# Altium PCB DBG-020.PcbDoc
Units mil, origin at the board's own origin, x right, y up, seen from the top; angles counter-clockwise.
Board outline 1750 x 2275 mil, 2 copper layers (Top Layer, Bottom Layer), stack 62.8 mil thick; 12 components, 55 nets, 445 pads, 120 vias.
Unrouted connection lines stored in the file: 1.
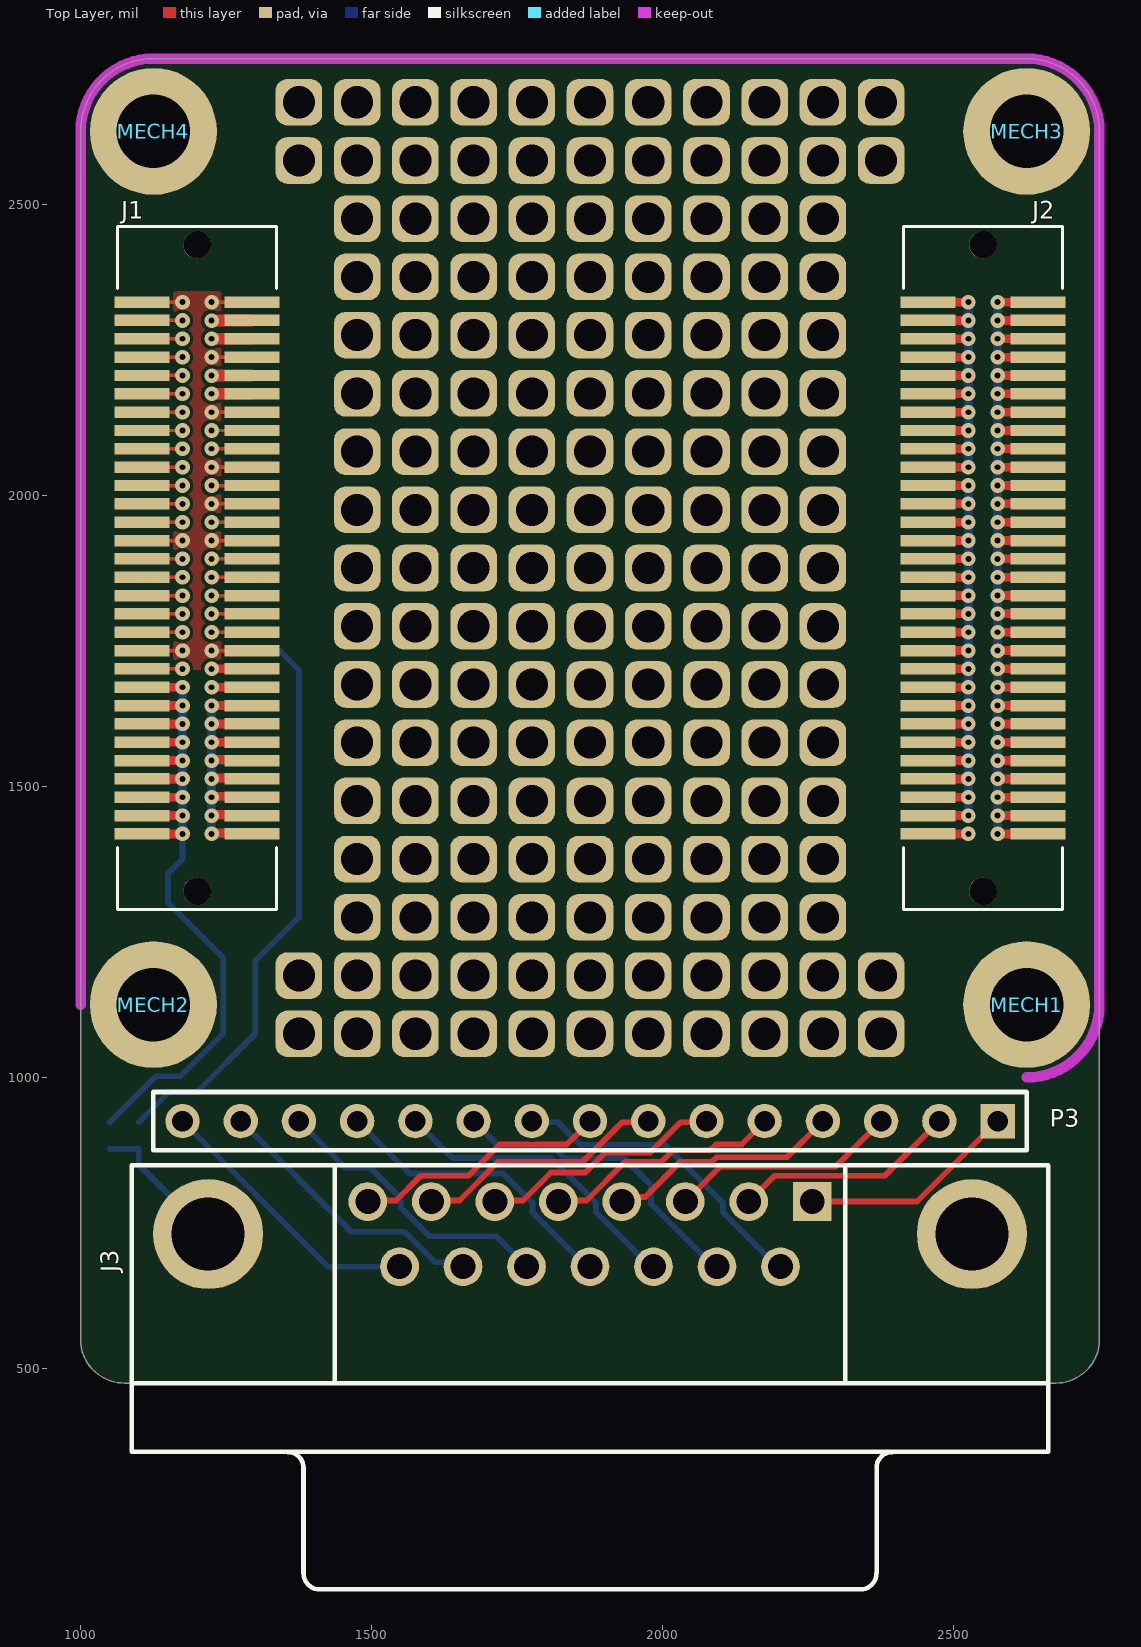
[diagram p0: Top Layer view]
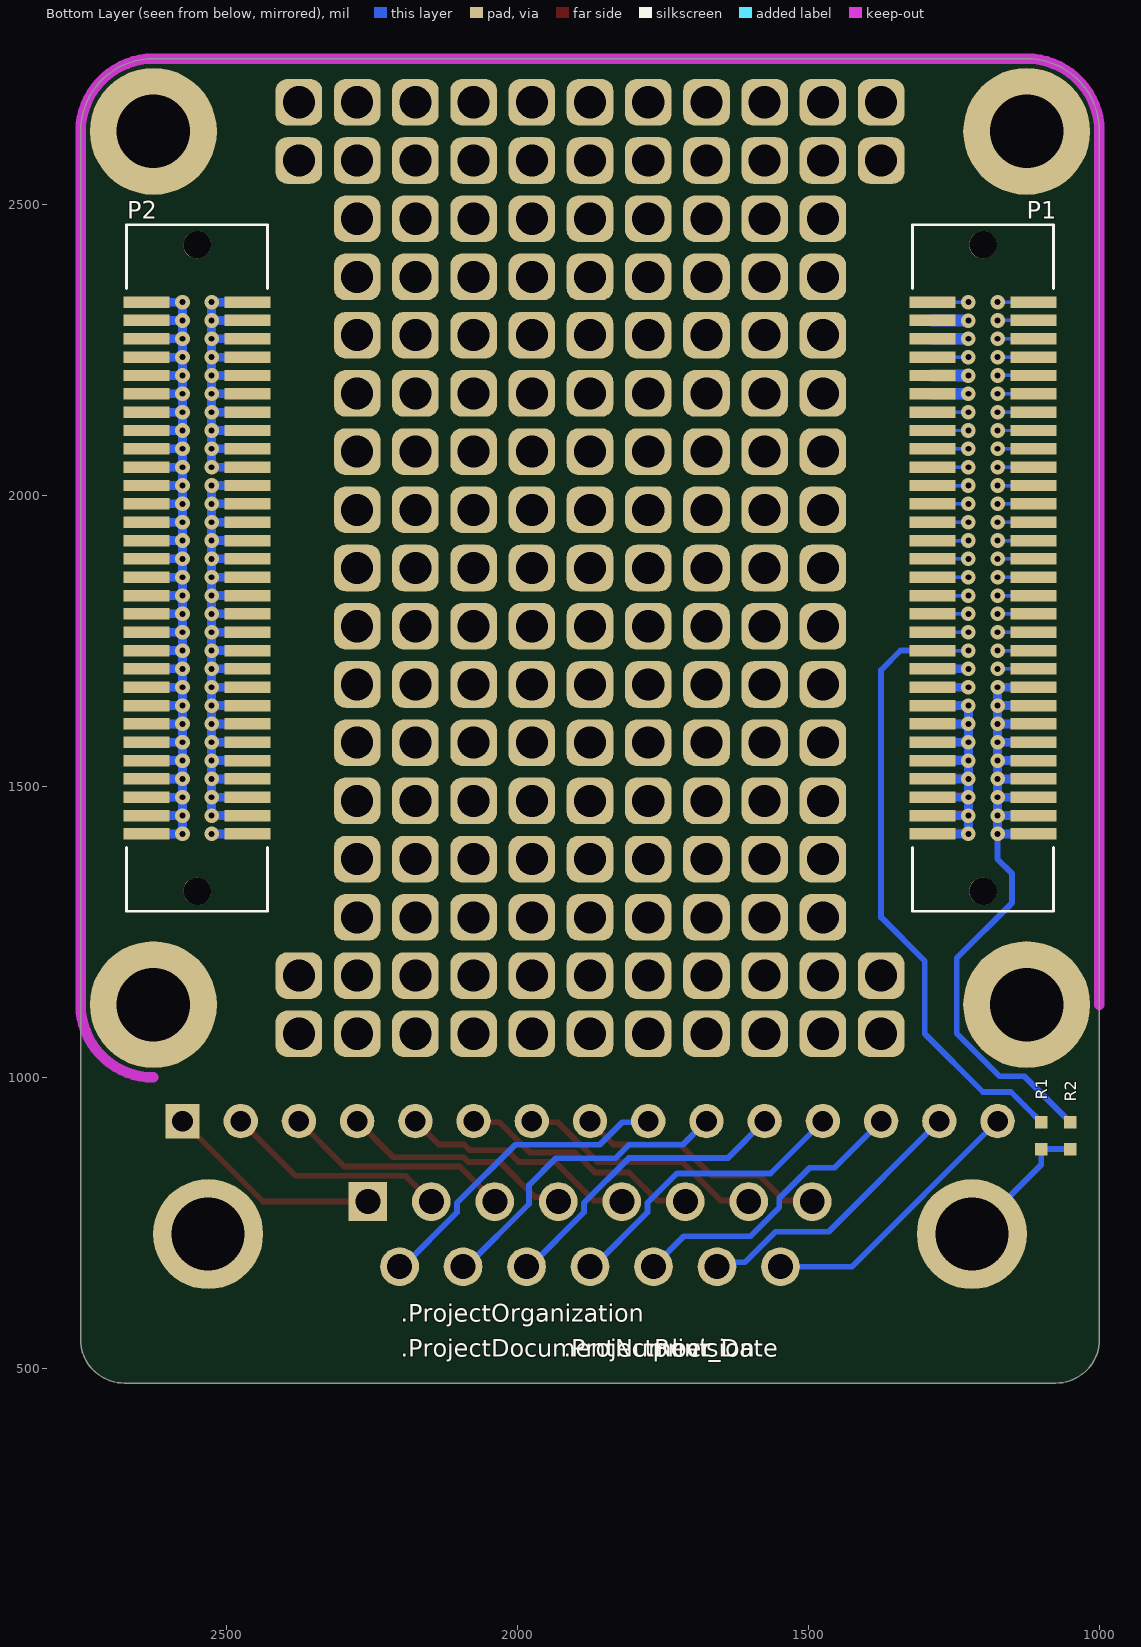
[diagram p1: Bottom Layer view, seen from below]
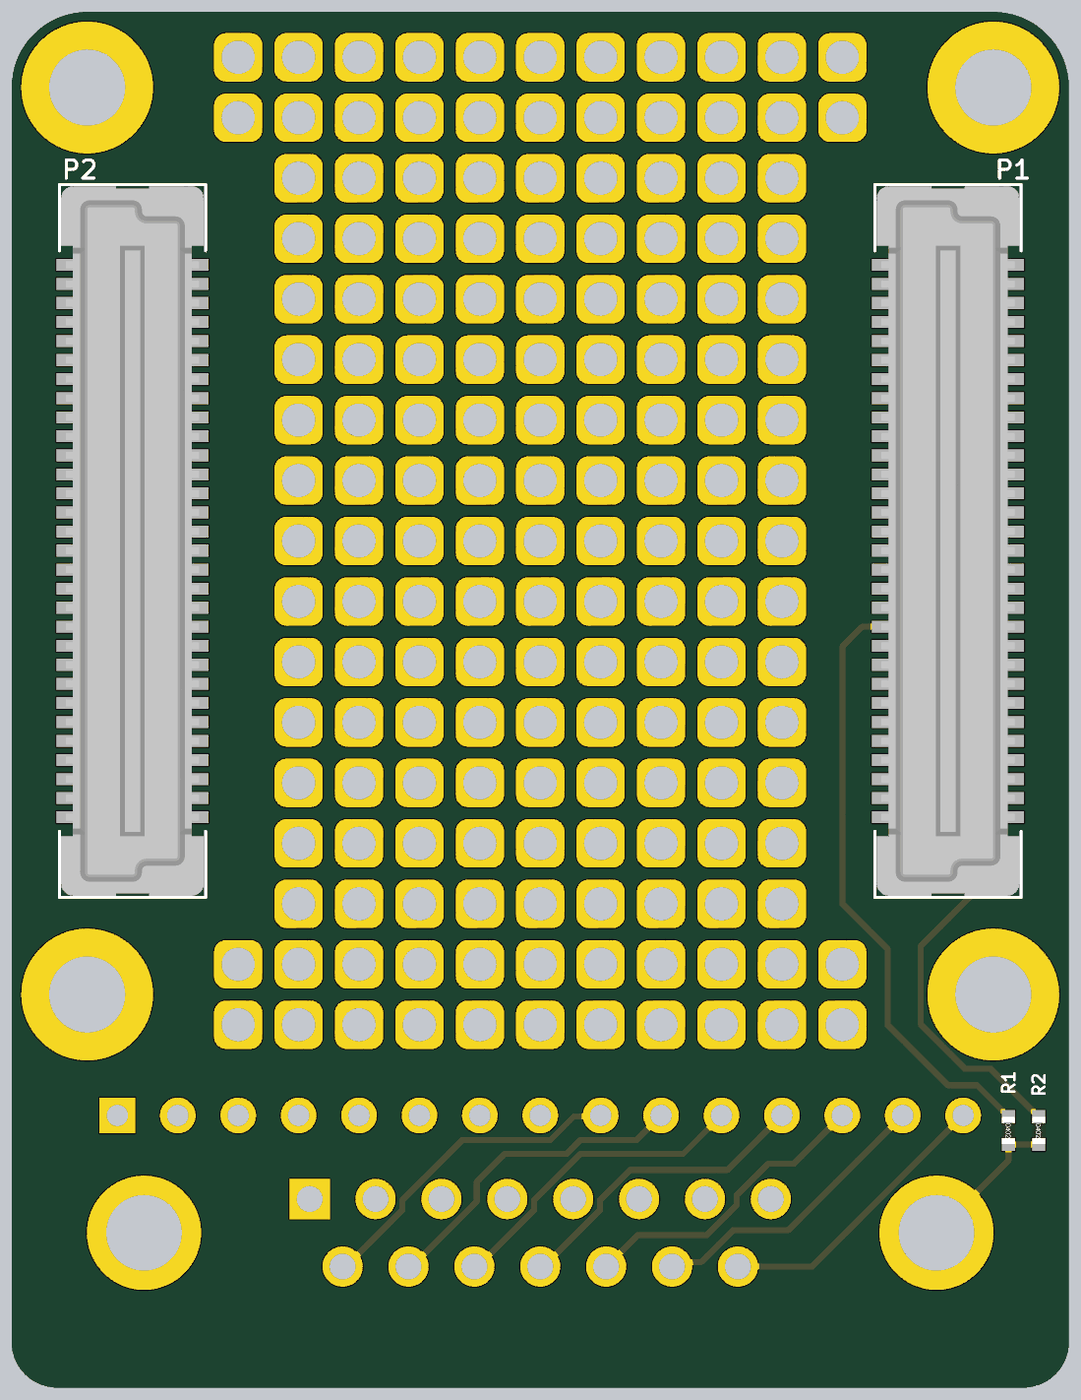
[diagram p2: 3D render of the assembled board from below, using the file's embedded part models]

## Layer stack, top to bottom
Top Solder: solder mask 1, Solder Resist, Dk 3.5
Top Layer: signal copper 1.4
Dielectric 1: core 60, FR-4, Dk 4.6
Bottom Layer: signal copper 1.4
Bottom Solder: solder mask 1, Solder Resist, Dk 3.5

## Board outline
1000,550 ccw(c1075,550) 1075,475 2675,475 ccw(c2675,550) 2750,550 2750,2625 ccw(c2625,2625) 2625,2750 1125,2750 ccw(c1125,2625) 1000,2625

## Design rules (kind name [scope] priority, off if disabled: settings)
AssemblyTestPointUsage AssemblyTestPointUsage_1 [All] p2:
AssemblyTestpoint AssemblyTestpoint_1 [All] p2: testpointundercomponent=TRUE minsize=40 maxsize=100 preferedsize=60 minholesize=0 maxholesize=40 preferedholesize=32 testpointgrid=1 usegrid=TRUE gridtolerance=0.01 allowsidetop=TRUE allowsidebottom=TRUE
BoardOutlineClearance [All] p1: gap=10 ignorepadtopadclearanceinfootprint=FALSE except(0: Arc-SplitContinuation Track-SplitContinuation SMDPad-SplitContinuation THPad-SplitContinuation Via-SplitContinuation Fill-SplitContinuation Poly-SplitContinuation Region-SplitContinuation Text-SplitContinuation)
Clearance [All] p1: gap=6 ignorepadtopadclearanceinfootprint=FALSE except(0: Arc-Hole Track-Hole SMDPad-Hole THPad-Hole Via-Hole Fill-Hole Poly-Hole Region-Hole Text-Hole)
ComponentClearance ComponentClearance_Top [OnTop vs OnTop] p1: gap=10 collisioncheckmode=3 verticalgap=100000 showdistances=FALSE
ComponentClearance ComponentClearance_Bottom [OnBottom vs OnBottom] p2: gap=10 collisioncheckmode=3 verticalgap=100000 showdistances=FALSE
DiffPairsRouting [All] p1: maxlimit=6 minlimit=6 mostfreqgap=6 toplayer_minwidth=20 toplayer_maxwidth=20 toplayer_prefwidth=20 bottomlayer_minwidth=20 bottomlayer_maxwidth=20 bottomlayer_prefwidth=20 maxuncoupledlength=500
FabricationTestPointUsage FabricationTestPointUsage_1 [All] p2: valid=0 allowmultiple=FALSE
FabricationTestpoint FabricationTestpoint_1 [All] p2: side=3 testpointundercomponent=TRUE minsize=40 maxsize=100 preferedsize=60 minholesize=0 maxholesize=40 preferedholesize=32 testpointgrid=1 allowsidetop=TRUE allowsidebottom=TRUE usegrid=TRUE gridtolerance=0.01
Height Height_Bottom [TouchesRoom('BoardHeight_Bottom') and OnBottom and not ((Name='J1') or (Name='J2') or (Name='P1') or (Name='P2') )] p1: minheight=0 maxheight=152 prefheight=0
Height Height_Top [TouchesRoom('BoardHeight_Top') and OnTop and not ((Name='J1') or (Name='J2') or (Name='P1') or (Name='P2') or (Name='MECH1') or (Name='MECH2') or (Name='MECH3') or (Name='MECH4') )] p2: minheight=0 maxheight=310 prefheight=0
HoleSize [All] p1: absolutevalues=TRUE maxlimit=130 minlimit=10 maxpercent=80.000 minpercent=20.000
MinimumSolderMaskSliver [All] p1: minsoldermaskwidth=3
PolygonConnect [All] p1: thpad.connectstyle=Relief thpad.reliefconductorwidth=6 thpad.reliefentries=4 thpad.polygonreliefangle="90 Angle" thpad.airgapwidth=6 smdpad.connectstyle=Relief smdpad.reliefconductorwidth=6 smdpad.reliefentries=4 smdpad.polygonreliefangle="90 Angle" smdpad.airgapwidth=6 via.connectstyle=Direct via.reliefconductorwidth=10 via.reliefentries=4 via.polygonreliefangle="90 Angle" via.airgapwidth=10
RoomDefinition BoardHeight_Bottom [False] p1: confinementstyle=ConfineIn formatcopy=TRUE lockcomponents=FALSE outline 1000,2750 2750,2750 2750,1000 1000,1000
RoomDefinition BoardHeight_Top [False] p2: confinementstyle=ConfineIn formatcopy=TRUE lockcomponents=FALSE outline 2750,2750 1000,2750 1000,1000 2750,1000
RoutingVias [All] p1: holewidth=10 width=25 viastyle="Through Hole" minholewidth=10 minwidth=25 maxholewidth=28 maxwidth=50
SilkToBoardRegionClearance SilkToBoardRegionClearance_1 [All] p2:
SilkToSilkClearance [All] p1: silktosilkclearance=2
SilkToSolderMaskClearance [IsPad] p1: minsilkscreentomaskgap=4 clearancetoexposedcopper=TRUE
SolderMaskExpansion [All] p1: expansion=2 istentingtop=FALSE
UnRoutedNet [All] p1: checkbadconnections=TRUE
Width Width_1 [All] p1: maxlimit=100 minlimit=6 preferedwidth=10
22 further rules are at their usual default settings.

## Classes and differential pairs
component class Sheet1: J1 J2 P1 P2
differential pair CAN1: +CAN1_P -CAN1_N
differential pair CAN0: +CAN0_P -CAN0_N

## Components (designator, comment, footprint, x,y, rotation, side; value= is the part's Value field where it differs from the comment)
J1 "10144517-064802LF" 10144517-064802LF 1200,1875 r90 top locked
J2 "10144517-064802LF" 10144517-064802LF 2550,1875 r90 top locked
J3 "D Connector 15" DSUB1.385-2H15 1875,356.89 r180 top locked
MECH1 "M2115-3005-SS" M2115-3005-SS 2625,1125 r0 top locked
MECH2 "M2115-3005-SS" M2115-3005-SS 1125,1125 r0 top locked
MECH3 "M2115-3005-SS" M2115-3005-SS 2625,2625 r0 top locked
MECH4 "M2115-3005-SS" M2115-3005-SS 1125,2625 r0 top locked
P1 "10144518-064802LF" 10144518-064802LF 1200,1875 r270 bottom locked
P2 "10144518-064802LF" 10144518-064802LF 2550,1875 r270 bottom locked
P3 "Header 15" HDR1X15 2575,925 r180 top locked
R1 "0.0" SMD-0402-RES 1100,900 r0 bottom locked
R2 "0.0" SMD-0402-RES 1050,900 r0 bottom locked

## Footprints (in the part's own frame and the unit in brackets; to place one, negate y for a bottom-side part, rotate by r counter-clockwise, add the part's x,y. Pads: shape width x height; smd on the part's side, far side on the other; paste and mask are expansions set on the pad)
10144517-064802LF [mm]
  rect 0.5x2.4 smd: 1(11.6,2.4) 2(11.6,-2.4) 3(10.8,2.4) 4(10.8,-2.4) 5(10,2.4) 6(10,-2.4) 7(9.2,2.4) 8(9.2,-2.4) 9(8.4,2.4) 10(8.4,-2.4) 11(7.6,2.4) 12(7.6,-2.4) 13(6.8,2.4) 14(6.8,-2.4) 15(6,2.4) 16(6,-2.4) 17(5.2,2.4) 18(5.2,-2.4) 19(4.4,2.4) 20(4.4,-2.4) 21(3.6,2.4) 22(3.6,-2.4) 23(2.8,2.4) 24(2.8,-2.4) 25(2,2.4) 26(2,-2.4) 27(1.2,2.4) 28(1.2,-2.4) 29(0.4,2.4) 30(0.4,-2.4) 31(-0.4,2.4) 32(-0.4,-2.4) 33(-1.2,2.4) 34(-1.2,-2.4) 35(-2,2.4) 36(-2,-2.4) 37(-2.8,2.4) 38(-2.8,-2.4) 39(-3.6,2.4) 40(-3.6,-2.4) 41(-4.4,2.4) 42(-4.4,-2.4) 43(-5.2,2.4) 44(-5.2,-2.4) 45(-6,2.4) 46(-6,-2.4) 47(-6.8,2.4) 48(-6.8,-2.4) 49(-7.6,2.4) 50(-7.6,-2.4) 51(-8.4,2.4) 52(-8.4,-2.4) 53(-9.2,2.4) 54(-9.2,-2.4) 55(-10,2.4) 56(-10,-2.4) 57(-10.8,2.4) 58(-10.8,-2.4) 59(-11.6,2.4) 60(-11.6,-2.4)
  round 1.2 hole 1.2 unplated: M1(14.1,0)
  silkscreen extent -14.9,-3.47 14.9,3.47, body extent -14.9,-3.4 14.9,3.4, height 15.65
10144518-064802LF [mm]
  rect 0.5x2 smd: 1(-11.6,2.2) 2(-11.6,-2.2) 3(-10.8,2.2) 4(-10.8,-2.2) 5(-10,2.2) 6(-10,-2.2) 7(-9.2,2.2) 8(-9.2,-2.2) 9(-8.4,2.2) 10(-8.4,-2.2) 11(-7.6,2.2) 12(-7.6,-2.2) 13(-6.8,2.2) 14(-6.8,-2.2) 15(-6,2.2) 16(-6,-2.2) 17(-5.2,2.2) 18(-5.2,-2.2) 19(-4.4,2.2) 20(-4.4,-2.2) 21(-3.6,2.2) 22(-3.6,-2.2) 23(-2.8,2.2) 24(-2.8,-2.2) 25(-2,2.2) 26(-2,-2.2) 27(-1.2,2.2) 28(-1.2,-2.2) 29(-0.4,2.2) 30(-0.4,-2.2) 31(0.4,2.2) 32(0.4,-2.2) 33(1.2,2.2) 34(1.2,-2.2) 35(2,2.2) 36(2,-2.2) 37(2.8,2.2) 38(2.8,-2.2) 39(3.6,2.2) 40(3.6,-2.2) 41(4.4,2.2) 42(4.4,-2.2) 43(5.2,2.2) 44(5.2,-2.2) 45(6,2.2) 46(6,-2.2) 47(6.8,2.2) 48(6.8,-2.2) 49(7.6,2.2) 50(7.6,-2.2) 51(8.4,2.2) 52(8.4,-2.2) 53(9.2,2.2) 54(9.2,-2.2) 55(10,2.2) 56(10,-2.2) 57(10.8,2.2) 58(10.8,-2.2) 59(11.6,2.2) 60(11.6,-2.2)
  round 1.2 hole 1.2 unplated: M2(14.1,0)
  silkscreen extent -14.97,-3.08 14.97,3.08, body extent -14.9,-3 14.9,3, height 7.65
DSUB1.385-2H15 [mm] "Connector; D Subminiature; 15 Position; Right Angle; Pitch 1.385 mm"
  rect 1.69x1.69 hole 1.09: 1(-9.695,-10.92)
  round 1.69 hole 1.09: 2(-6.925,-10.92) 3(-4.155,-10.92) 4(-1.385,-10.92) 5(1.385,-10.92) 6(4.155,-10.92) 7(6.925,-10.92) 8(9.695,-10.92) 9(-8.31,-8.08) 10(-5.54,-8.08) 11(-2.77,-8.08) 12(0,-8.08) 13(2.77,-8.08) 14(5.54,-8.08) 15(8.31,-8.08)
  round 4.8 hole 3.18: 16(-16.66,-9.5) 17(16.66,-9.5)
  silkscreen extent -20,-12.5 20,6
HDR1X15 [mm] "Connector; Header; 15 Position"
  rect 1.5x1.5 hole 0.9: 1(0,0)
  round 1.5 hole 0.9: 2(2.54,0) 3(5.08,0) 4(7.62,0) 5(10.16,0) 6(12.7,0) 7(15.24,0) 8(17.78,0) 9(20.32,0) 10(22.86,0) 11(25.4,0) 12(27.94,0) 13(30.48,0) 14(33.02,0) 15(35.56,0)
  silkscreen extent -1.27,-1.27 36.83,1.27
M2115-3005-SS [mil]
  body extent -89,-102 89,102, height 787
SMD-0402-RES [mm]
  rect 0.55x0.55 smd: 1(0,0.584) 2(0,-0.584)
  body extent -0.27,-0.57 0.28,0.58, height 0.41

## Part data
J3: "Receptacle Assembly, 15 Position, Right Angle", PackageDocument=O, DatasheetDocument=1-Sep-99, Gender=Receptacle, LatestRevisionDate=17-Jul-2002, LatestRevisionNote="Re-released for DXP Platform.", Orientation="Right Angle", PackageReference=788757, Positions=15, Published=15-Jun-2001, Publisher="Altium Limited"
P3: "Header, 15-Pin", LatestRevisionDate=17-Jul-2002, LatestRevisionNote="Re-released for DXP Platform.", Publisher="Altium Limited"
R1 R2: library part ERJ-2GE0R00X, "RES SMD 0.0OHM JUMPER 1/10W 0402", Digi-Key Part Number=P0.0JCT-ND, Manufacturer="Panasonic Electronic Components", Operating Temperature="-55°C ~ 155°C", Package / Case="0402 (1005 Metric)", Power (Watts)="0.1W, 1/10W", Supplier Device Package=0402, Temperature Coefficient=-, Tolerance=Jumper, @ qty=1500, Composition="Thick Film", Datasheets=http://industrial.panasonic.com/www-cgi/jvcr13pz.cgi?E+PZ+3+AOA0001+ERJ2GE0R00X+7+WW, Factory Stock=0, Failure Rate=-, Features="Automotive AEC-Q200", Height - Seated (Max)="0.016\" (0.40mm)", Image=//media.digikey.com/Photos/Panasonic%20Photos/ERJ-PA2-Series.jpg, Minimum Quantity=1, Number of Terminations=2, Packaging="Cut Tape (CT)", Part Number=ERJ-2GE0R00X, Part Status=Active, Quantity Available=3152483, Series=ERJ, Size / Dimension="0.039\" L x 0.020\" W (1.00mm x 0.50mm)", Unit Price (USD)=0.00384
J1 J2: Unit Price (USD)=1.95
MECH1 MECH2 MECH3 MECH4: Unit Price (USD)=1.81
P1 P2: Unit Price (USD)=1.52

## Free pads (board coordinates)
  round 218 hole 125.98: 0(1125,1125) 0(1125,2625) 0(2625,1125) 0(2625,2625)
  rrect50% 80x80 hole 55.12: 1(1375,1075) 1(1375,1175) 1(1375,2575) 1(1375,2675) 1(1475,1075) 1(1475,1175) 1(1475,1275) 1(1475,1375) 1(1475,1475) 1(1475,1575) 1(1475,1675) 1(1475,1775) 1(1475,1875) 1(1475,1975) 1(1475,2075) 1(1475,2175) 1(1475,2275) 1(1475,2375) 1(1475,2475) 1(1475,2575) 1(1475,2675) 1(1575,1075) 1(1575,1175) 1(1575,1275) 1(1575,1375) 1(1575,1475) 1(1575,1575) 1(1575,1675) 1(1575,1775) 1(1575,1875) 1(1575,1975) 1(1575,2075) 1(1575,2175) 1(1575,2275) 1(1575,2375) 1(1575,2475) 1(1575,2575) 1(1575,2675) 1(1675,1075) 1(1675,1175) 1(1675,1275) 1(1675,1375) 1(1675,1475) 1(1675,1575) 1(1675,1675) 1(1675,1775) 1(1675,1875) 1(1675,1975) 1(1675,2075) 1(1675,2175) 1(1675,2275) 1(1675,2375) 1(1675,2475) 1(1675,2575) 1(1675,2675) 1(1775,1075) 1(1775,1175) 1(1775,1275) 1(1775,1375) 1(1775,1475) 1(1775,1575) 1(1775,1675) 1(1775,1775) 1(1775,1875) 1(1775,1975) 1(1775,2075) 1(1775,2175) 1(1775,2275) 1(1775,2375) 1(1775,2475) 1(1775,2575) 1(1775,2675) 1(1875,1075) 1(1875,1175) 1(1875,1275) 1(1875,1375) 1(1875,1475) 1(1875,1575) 1(1875,1675) 1(1875,1775) 1(1875,1875) 1(1875,1975) 1(1875,2075) 1(1875,2175) 1(1875,2275) 1(1875,2375) 1(1875,2475) 1(1875,2575) 1(1875,2675) 1(1975,1075) 1(1975,1175) 1(1975,1275) 1(1975,1375) 1(1975,1475) 1(1975,1575) 1(1975,1675) 1(1975,1775) 1(1975,1875) 1(1975,1975) 1(1975,2075) 1(1975,2175) 1(1975,2275) 1(1975,2375) 1(1975,2475) 1(1975,2575) 1(1975,2675) 1(2075,1075) 1(2075,1175) 1(2075,1275) 1(2075,1375) 1(2075,1475) 1(2075,1575) 1(2075,1675) 1(2075,1775) 1(2075,1875) 1(2075,1975) 1(2075,2075) 1(2075,2175) 1(2075,2275) 1(2075,2375) 1(2075,2475) 1(2075,2575) 1(2075,2675) 1(2175,1075) 1(2175,1175) 1(2175,1275) 1(2175,1375) 1(2175,1475) 1(2175,1575) 1(2175,1675) 1(2175,1775) 1(2175,1875) 1(2175,1975) 1(2175,2075) 1(2175,2175) 1(2175,2275) 1(2175,2375) 1(2175,2475) 1(2175,2575) 1(2175,2675) 1(2275,1075) 1(2275,1175) 1(2275,1275) 1(2275,1375) 1(2275,1475) 1(2275,1575) 1(2275,1675) 1(2275,1775) 1(2275,1875) 1(2275,1975) 1(2275,2075) 1(2275,2175) 1(2275,2275) 1(2275,2375) 1(2275,2475) 1(2275,2575) 1(2275,2675) 1(2375,1075) 1(2375,1175) 1(2375,2575) 1(2375,2675)

## Via types
v1: diameter 25, hole 10, Top Layer to Bottom Layer, tented both sides, 120 vias

## Nets (pads, with @x,y where several pads share a name; then routed paths per layer and width w, separated by ;. In a path a pad name is that pad's centre, name@x,y a point inside that pad or via, vN(x,y) a via of type N, cw(c..) or ccw(c..) an arc to the next point about the centre after c; other vN are vias at no path point)
1: J3.1 P3.1 | length 375.5
  Top Layer w10: J3.1 2436.81,786.81 P3.1
2: J3.2 P3.2 | length 384.6
  Top Layer w10: J3.2 2191.91,831.08 2381.08,831.08 P3.2
3: J3.3 P3.3 | length 393.7
  Top Layer w10: J3.3 2098.85,847.08 2297.08,847.08 P3.3
4: J3.4 P3.4 | length 402.7
  Top Layer w10: J3.4 1937.52,794.8 1969.8,794.8 2030,855 2084.14,855 2092.22,863.08 2213.08,863.08 P3.4
5: J3.5 P3.5 | length 411.8
  Top Layer w10: J3.5 1822.29,788.63 1868.74,788.63 1935.11,855 1997.72,855 2017.72,875 2081.52,875 2091.52,885 2135,885 P3.5
6: J3.6 P3.6 | length 420.8
  Top Layer w10: J3.6 1713.23,788.63 1759.68,788.63 1807.98,836.92 1866.86,836.92 1900.94,871 1978.31,871 2030.47,923.16 2073.16,923.16 P3.6
7: J3.7 P3.7 | length 429.9
  Top Layer w10: J3.7 1604.18,788.63 1650.63,788.63 1717,855 1862.31,855 1930.47,923.16 1973.16,923.16 P3.7
8: J3.8 P3.8 | length 439
  Top Layer w10: J3.8 1495.12,788.63 1541.57,788.63 1584.03,831.08 1666.08,831.08 1720,885 1768.48,885 ccw(c1775,925) 1781.52,885 1835,885 P3.8
9: J3.9 P3.9 | length 540.2
  Bottom Layer w10: P3.9 1776.84,923.16 1819.53,923.16 1858.21,884.47 2003.53,884.47 2103.37,784.63 2103.37,768.47 2196.85,675 J3.9
10: J3.10 P3.10 | length 540.5
  Bottom Layer w10: P3.10 1715.53,884.47 1808.04,884.47 1831.26,861.26 1933.74,861.26 1980,815 1980,782.79 2087.79,675 J3.10
11: J3.11 P3.11 | length 522.1
  Bottom Layer w10: P3.11 1638.58,861.42 1808.47,861.42 1885.26,784.63 1885.26,768.47 1978.74,675 J3.11
12: J3.12 P3.12 | length 513
  Bottom Layer w10: P3.12 1565,835 1725.83,835 1776.2,784.63 1776.2,768.47 1869.68,675 J3.12
13: J3.13 P3.13 | length 504
  Bottom Layer w10: P3.13 1455,845 1497.72,845 1550,792.72 1550,776.57 1599.42,727.15 1713.8,727.15 J3.13
14: J3.14 P3.14 | length 485.4
  Bottom Layer w10: P3.14 1465,735 1556.27,735 1608.62,682.65 1649.24,682.65 J3.14
15: J3.15 P3.15 | length 476.4
  Bottom Layer w10: P3.15 1425,675 J3.15
+0.9V_REF: J1.42 P1.42 | length 131.1
  Top Layer w15: v1(1225,1701.77) J1.42
  Bottom Layer w15: v1(1225,1701.77) P1.42
+5V: J1.46 J1.48 J1.50 J1.52 J1.54 J1.56 J1.58 J1.60 P1.46 P1.48 P1.50 P1.52 P1.54 P1.56 P1.58 P1.60 | length 1269.3
  Top Layer w15: v1(1225,1575.79) J1.50 ; v1(1225,1607.28) J1.48 ; v1(1225,1638.78) J1.46 ; v1@1235.51,1420 J1.60@1305,1420 ; v1@1235.51,1451.5 J1.58@1305,1451.5 ; v1@1235.51,1482.99 J1.56@1305,1482.99 ; v1@1235.51,1514.49 J1.54@1305,1514.49 ; v1@1235.51,1545.98 J1.52@1305,1545.98
  Bottom Layer w15: P1.60 v1(1225,1418.31) v1(1225,1449.8) ; P1.58 v1(1225,1449.8) ; P1.56 v1(1225,1481.3) ; P1.54 v1(1225,1512.8) ; P1.52 v1(1225,1544.29) ; P1.50 v1(1225,1575.79) ; P1.48 v1(1225,1607.28) ; P1.46 v1(1225,1638.78) v1(1225,1607.28) ; v1(1225,1449.8) v1(1225,1481.3) ; v1(1225,1481.3) v1(1225,1512.8) ; v1(1225,1512.8) v1(1225,1544.29) ; v1(1225,1544.29) v1(1225,1575.79) ; v1(1225,1575.79) v1(1225,1607.28)
+5V_BOOTSTRAP: J1.44 P1.44 | length 131.1
  Top Layer w15: v1(1225,1670.28) J1.44
  Bottom Layer w15: v1(1225,1670.28) P1.44
+5V_Preboot: J1.25 P1.25 | length 131.1
  Top Layer w6: J1.25 v1(1175,1953.74)
  Bottom Layer w6: P1.25 v1(1175,1953.74)
+12V: J2.1 J2.3 J2.5 J2.7 J2.9 J2.11 J2.13 J2.15 J2.17 J2.19 P2.1 P2.3 P2.5 P2.7 P2.9 P2.11 P2.13 P2.15 P2.17 P2.19 | length 1594.5
  Top Layer w15: J2.19 v1(2525,2048.23) ; J2.17 v1(2525,2079.72) ; J2.15 v1(2525,2111.22) ; J2.13 v1(2525,2142.72) ; J2.11 v1(2525,2174.21) ; J2.9 v1(2525,2205.71) ; J2.7 v1(2525,2237.2) ; J2.5 v1(2525,2268.7) ; J2.3 v1(2525,2300.2) ; J2.1 v1(2525,2331.69)
  Bottom Layer w15: P2.19 v1(2525,2048.23) v1(2525,2079.72) ; P2.17 v1(2525,2079.72) ; P2.15 v1(2525,2111.22) ; P2.13 v1(2525,2142.72) ; P2.11 v1(2525,2174.21) ; P2.9 v1(2525,2205.71) ; P2.7 v1(2525,2237.2) ; P2.5 v1(2525,2268.7) ; P2.3 v1(2525,2300.2) ; P2.1 v1(2525,2331.69) v1(2525,2300.2) ; v1(2525,2079.72) v1(2525,2111.22) ; v1(2525,2111.22) v1(2525,2142.72) ; v1(2525,2142.72) v1(2525,2174.21) ; v1(2525,2174.21) v1(2525,2205.71) ; v1(2525,2205.71) v1(2525,2237.2) ; v1(2525,2237.2) v1(2525,2268.7) ; v1(2525,2268.7) v1(2525,2300.2)
+VBAT: J2.21 J2.23 J2.25 J2.27 J2.29 J2.31 J2.33 J2.35 J2.37 J2.39 J2.41 J2.43 J2.45 J2.47 J2.49 J2.51 J2.53 J2.55 J2.57 P2.21 P2.23 P2.25 P2.27 P2.29 P2.31 P2.33 P2.35 P2.37 P2.39 P2.41 P2.43 P2.45 P2.47 P2.49 P2.51 P2.53 P2.55 P2.57 | length 3057.9
  Top Layer w15: J2.57 v1(2525,1449.8) ; J2.55 v1(2525,1481.3) ; J2.53 v1(2525,1512.8) ; J2.51 v1(2525,1544.29) ; J2.49 v1(2525,1575.79) ; J2.47 v1(2525,1607.28) ; J2.45 v1(2525,1638.78) ; J2.43 v1(2525,1670.28) ; J2.41 v1(2525,1701.77) ; J2.39 v1(2525,1733.27) ; J2.37 v1(2525,1764.76) ; J2.35 v1(2525,1796.26) ; J2.33 v1(2525,1827.76) ; J2.31 v1(2525,1859.25) ; J2.29 v1(2525,1890.75) ; J2.27 v1(2525,1922.24) ; J2.25 v1(2525,1953.74) ; J2.23 v1(2525,1985.24) ; J2.21 v1(2525,2016.73)
  Bottom Layer w15: P2.57 v1(2525,1449.8) v1(2525,1481.3) ; P2.55 v1(2525,1481.3) ; P2.53 v1(2525,1512.8) ; P2.51 v1(2525,1544.29) ; P2.49 v1(2525,1575.79) ; P2.47 v1(2525,1607.28) ; P2.45 v1(2525,1638.78) ; P2.43 v1(2525,1670.28) ; P2.41 v1(2525,1701.77) ; P2.39 v1(2525,1733.27) ; P2.37 v1(2525,1764.76) ; P2.35 v1(2525,1796.26) ; P2.33 v1(2525,1827.76) ; P2.31 v1(2525,1859.25) ; P2.29 v1(2525,1890.75) ; P2.27 v1(2525,1922.24) ; P2.25 v1(2525,1953.74) ; P2.23 v1(2525,1985.24) ; P2.21 v1(2525,2016.73) v1(2525,1985.24) ; v1(2525,1481.3) v1(2525,1512.8) ; v1(2525,1512.8) v1(2525,1544.29) ; v1(2525,1544.29) v1(2525,1575.79) ; v1(2525,1575.79) v1(2525,1607.28) ; v1(2525,1607.28) v1(2525,1638.78) ; v1(2525,1638.78) v1(2525,1670.28) ; v1(2525,1670.28) v1(2525,1701.77) ; v1(2525,1701.77) v1(2525,1733.27) ; v1(2525,1733.27) v1(2525,1764.76) ; v1(2525,1764.76) v1(2525,1796.26) ; v1(2525,1796.26) v1(2525,1827.76) ; v1(2525,1827.76) v1(2525,1859.25) ; v1(2525,1859.25) v1(2525,1890.75) ; v1(2525,1890.75) v1(2525,1922.24) ; v1(2525,1922.24) v1(2525,1953.74) ; v1(2525,1953.74) v1(2525,1985.24)
+VBAT_Preboot: J2.59 P2.59 | length 131.1
  Top Layer w15: J2.59 v1(2525,1418.31)
  Bottom Layer w15: P2.59 v1(2525,1418.31)
CAN0_N: J1.4 P1.4 | length 126.3
  Top Layer w20: v1@1230,2299.95 1237,2299.95 1237.24,2300.2 J1.4
  Bottom Layer w20: v1(1225,2299.95) 1232,2299.95 1232.24,2300.2 P1.4
CAN0_P: J1.6 P1.6 | length 126.3
  Top Layer w20: v1@1230,2268.95 1237,2268.95 1237.24,2268.7 J1.6
  Bottom Layer w20: v1(1225,2268.95) 1232,2268.95 1232.24,2268.7 P1.6
CAN1_N: J1.10 P1.10 | length 126.3
  Top Layer w20: v1@1230,2205.46 1237,2205.46 1237.24,2205.71 J1.10
  Bottom Layer w20: v1(1225,2205.46) 1232,2205.46 1232.24,2205.71 P1.10
CAN1_P: J1.12 P1.12 | length 126.3
  Top Layer w20: v1@1230,2174.46 1237,2174.46 1237.24,2174.21 J1.12
  Bottom Layer w20: v1(1225,2174.46) 1232,2174.46 1232.24,2174.21 P1.12
CTRL_SYNC: J1.26 P1.26 | length 131.1
  Top Layer w6: v1(1225,1953.74) J1.26
  Bottom Layer w6: v1(1225,1953.74) P1.26
DETECT: J1.32 P1.32 | length 131.1
  Top Layer w6: v1(1225,1859.25) J1.32
  Bottom Layer w6: v1(1225,1859.25) P1.32
DRAIN: J1.1 J1.2 J1.8 J1.14 J1.20 J1.24 J1.27 J1.28 J1.39 J1.40 P1.1 P1.2 P1.8 P1.14 P1.20 P1.24 P1.27 P1.28 P1.39 P1.40 R1.2 | length 2401.7
  Top Layer w6: J1.39 v1(1175,1733.27) ; J1.27 v1(1175,1922.24) ; v1(1225,1733.27) J1.40 ; v1(1225,1922.24) J1.28 ; v1(1225,1985.24) J1.24 ; v1(1225,2048.23) J1.20 ; v1(1225,2142.72) J1.14 ; v1(1225,2237.2) J1.8 ; v1(1225,2331.69) J1.2 ; J1.1 v1(1175,2331.69) J1.1
  Bottom Layer w6: P1.39 v1(1175,1733.27) ; P1.27 v1(1175,1922.24) ; P1.1 v1(1175,2331.69) ; v1(1225,1733.27) P1.40 ; v1(1225,1922.24) P1.28 ; v1(1225,1985.24) P1.24 ; v1(1225,2048.23) P1.20 ; v1(1225,2142.72) P1.14 ; v1(1225,2237.2) P1.8 ; v1(1225,2331.69) P1.2
  Bottom Layer w10: R1.2 1127.91,950.91 1152,975 1200,975 1300,1075 1300,1200 1375,1275 1375,1700 1341.73,1733.27 P1.40
EN_0: J1.34 P1.34 | length 131.1
  Top Layer w6: v1(1225,1827.76) J1.34
  Bottom Layer w6: v1(1225,1827.76) P1.34
EN_1: J1.36 P1.36 | length 131.1
  Top Layer w6: v1(1225,1796.26) J1.36
  Bottom Layer w6: v1(1225,1796.26) P1.36
EN_2: J1.38 P1.38 | length 131.1
  Top Layer w6: v1(1225,1764.76) J1.38
  Bottom Layer w6: v1(1225,1764.76) P1.38
GND: J1.43 J1.45 J1.47 J1.49 J1.51 J1.53 J1.55 J1.57 J1.59 J2.2 J2.4 J2.6 J2.8 J2.10 J2.12 J2.14 J2.16 J2.18 J2.20 J2.22 J2.24 J2.26 J2.28 J2.30 J2.32 J2.34 J2.36 J2.38 J2.40 J2.42 J2.44 J2.46 J2.48 J2.50 J2.52 J2.54 J2.56 J2.58 J2.60 P1.43 P1.45 P1.47 P1.49 P1.51 P1.53 P1.55 P1.57 P1.59 P2.2 P2.4 P2.6 P2.8 P2.10 P2.12 P2.14 P2.16 P2.18 P2.20 P2.22 P2.24 P2.26 P2.28 P2.30 P2.32 P2.34 P2.36 P2.38 P2.40 P2.42 P2.44 P2.46 P2.48 P2.50 P2.52 P2.54 P2.56 P2.58 P2.60 R2.2 | length 6929.1
  Top Layer w15: J1.59 v1(1175,1418.31) ; J1.57 v1(1175,1449.8) ; J1.55 v1(1175,1481.3) ; J1.53 v1(1175,1512.8) ; J1.51 v1(1175,1544.29) ; J1.49 v1(1175,1575.79) ; J1.47 v1(1175,1607.28) ; J1.45 v1(1175,1638.78) ; J1.43 v1(1175,1670.28) ; v1(2575,1418.31) J2.60 ; v1(2575,1449.8) J2.58 ; v1(2575,1481.3) J2.56 ; v1(2575,1512.8) J2.54 ; v1(2575,1544.29) J2.52 ; v1(2575,1575.79) J2.50 ; v1(2575,1607.28) J2.48 ; v1(2575,1638.78) J2.46 ; v1(2575,1670.28) J2.44 ; v1(2575,1701.77) J2.42 ; v1(2575,1733.27) J2.40 ; v1(2575,1764.76) J2.38 ; v1(2575,1796.26) J2.36 ; v1(2575,1827.76) J2.34 ; v1(2575,1859.25) J2.32 ; v1(2575,1890.75) J2.30 ; v1(2575,1922.24) J2.28 ; v1(2575,1953.74) J2.26 ; v1(2575,1985.24) J2.24 ; v1(2575,2016.73) J2.22 ; v1(2575,2048.23) J2.20 ; v1(2575,2079.72) J2.18 ; v1(2575,2111.22) J2.16 ; v1(2575,2142.72) J2.14 ; v1(2575,2174.21) J2.12 ; v1(2575,2205.71) J2.10 ; v1(2575,2237.2) J2.8 ; v1(2575,2268.7) J2.6 ; v1(2575,2300.2) J2.4 ; v1(2575,2331.69) J2.2
  Bottom Layer w10: R2.2 1129.06,1002.06 1171.77,1002.06 1245,1075.29 1245,1205 1150,1300 1150,1350 1175,1375 v1(1175,1418.31)
  Bottom Layer w15: P1.59 v1(1175,1418.31) v1(1175,1449.8) ; P1.57 v1(1175,1449.8) ; P1.55 v1(1175,1481.3) ; P1.53 v1(1175,1512.8) ; P1.51 v1(1175,1544.29) ; P1.49 v1(1175,1575.79) ; P1.47 v1(1175,1607.28) ; P1.45 v1(1175,1638.78) ; P1.43 v1(1175,1670.28) v1(1175,1638.78) ; P2.60 v1(2575,1418.31) v1(2575,1449.8) ; P2.58 v1(2575,1449.8) ; P2.56 v1(2575,1481.3) ; P2.54 v1(2575,1512.8) ; P2.52 v1(2575,1544.29) ; P2.50 v1(2575,1575.79) ; P2.48 v1(2575,1607.28) ; P2.46 v1(2575,1638.78) ; P2.44 v1(2575,1670.28) ; P2.42 v1(2575,1701.77) ; P2.40 v1(2575,1733.27) ; P2.38 v1(2575,1764.76) ; P2.36 v1(2575,1796.26) ; P2.34 v1(2575,1827.76) ; P2.32 v1(2575,1859.25) ; P2.30 v1(2575,1890.75) ; P2.28 v1(2575,1922.24) ; P2.26 v1(2575,1953.74) ; P2.24 v1(2575,1985.24) ; P2.22 v1(2575,2016.73) ; P2.20 v1(2575,2048.23) ; P2.18 v1(2575,2079.72) ; P2.16 v1(2575,2111.22) ; P2.14 v1(2575,2142.72) ; P2.12 v1(2575,2174.21) ; P2.10 v1(2575,2205.71) ; P2.8 v1(2575,2237.2) ; P2.6 v1(2575,2268.7) ; P2.4 v1(2575,2300.2) ; P2.2 v1(2575,2331.69) v1(2575,2300.2) ; v1(1175,1449.8) v1(1175,1481.3) ; v1(1175,1481.3) v1(1175,1512.8) ; v1(1175,1512.8) v1(1175,1544.29) ; v1(1175,1544.29) v1(1175,1575.79) ; v1(1175,1575.79) v1(1175,1607.28) ; v1(1175,1607.28) v1(1175,1638.78) ; v1(2575,1449.8) v1(2575,1481.3) ; v1(2575,1481.3) v1(2575,1512.8) ; v1(2575,1512.8) v1(2575,1544.29) ; v1(2575,1544.29) v1(2575,1575.79) ; v1(2575,1575.79) v1(2575,1607.28) ; v1(2575,1607.28) v1(2575,1638.78) ; v1(2575,1638.78) v1(2575,1670.28) ; v1(2575,1670.28) v1(2575,1701.77) ; v1(2575,1701.77) v1(2575,1733.27) ; v1(2575,1733.27) v1(2575,1764.76) ; v1(2575,1764.76) v1(2575,1796.26) ; v1(2575,1796.26) v1(2575,1827.76) ; v1(2575,1827.76) v1(2575,1859.25) ; v1(2575,1859.25) v1(2575,1890.75) ; v1(2575,1890.75) v1(2575,1922.24) ; v1(2575,1922.24) v1(2575,1953.74) ; v1(2575,1953.74) v1(2575,1985.24) ; v1(2575,1985.24) v1(2575,2016.73) ; v1(2575,2016.73) v1(2575,2048.23) ; v1(2575,2048.23) v1(2575,2079.72) ; v1(2575,2079.72) v1(2575,2111.22) ; v1(2575,2111.22) v1(2575,2142.72) ; v1(2575,2142.72) v1(2575,2174.21) ; v1(2575,2174.21) v1(2575,2205.71) ; v1(2575,2205.71) v1(2575,2237.2) ; v1(2575,2237.2) v1(2575,2268.7) ; v1(2575,2268.7) v1(2575,2300.2)
I2C_SCL: J1.18 P1.18 | length 131.1
  Top Layer w6: v1(1225,2079.72) J1.18
  Bottom Layer w6: v1(1225,2079.72) P1.18
I2C_SDA: J1.16 P1.16 | length 131.1
  Top Layer w6: v1(1225,2111.22) J1.16
  Bottom Layer w6: v1(1225,2111.22) P1.16
NetJ3_17: J3.17 R1.1 R2.1 | length 245.4
  Bottom Layer w10: R2.1 R1.1 1100,850 J3.17
P_GOOD: J1.30 P1.30 | length 131.1
  Top Layer w6: v1(1225,1890.75) J1.30
  Bottom Layer w6: v1(1225,1890.75) P1.30
PPS: J1.22 P1.22 | length 131.1
  Top Layer w6: v1(1225,2016.73) J1.22
  Bottom Layer w6: v1(1225,2016.73) P1.22
QSPI_CLK: J1.29 P1.29 | length 131.1
  Top Layer w6: J1.29 v1(1175,1890.75)
  Bottom Layer w6: P1.29 v1(1175,1890.75)
QSPI_IO0: J1.31 P1.31 | length 131.1
  Top Layer w6: J1.31 v1(1175,1859.25)
  Bottom Layer w6: P1.31 v1(1175,1859.25)
QSPI_IO1: J1.33 P1.33 | length 131.1
  Top Layer w6: J1.33 v1(1175,1827.76)
  Bottom Layer w6: P1.33 v1(1175,1827.76)
QSPI_IO2: J1.35 P1.35 | length 131.1
  Top Layer w6: J1.35 v1(1175,1796.26)
  Bottom Layer w6: P1.35 v1(1175,1796.26)
QSPI_IO3: J1.37 P1.37 | length 131.1
  Top Layer w6: J1.37 v1(1175,1764.76)
  Bottom Layer w6: P1.37 v1(1175,1764.76)
RFU_3: J1.3 P1.3 | length 131.1
  Top Layer w6: J1.3 v1(1175,2300.2)
  Bottom Layer w6: P1.3 v1(1175,2300.2)
RFU_5: J1.5 P1.5 | length 131.1
  Top Layer w6: J1.5 v1(1175,2268.7)
  Bottom Layer w6: P1.5 v1(1175,2268.7)
RFU_7: J1.7 P1.7 | length 131.1
  Top Layer w6: J1.7 v1(1175,2237.2)
  Bottom Layer w6: P1.7 v1(1175,2237.2)
RFU_9: J1.9 P1.9 | length 131.1
  Top Layer w6: J1.9 v1(1175,2205.71)
  Bottom Layer w6: P1.9 v1(1175,2205.71)
RFU_11: J1.11 P1.11 | length 131.1
  Top Layer w6: J1.11 v1(1175,2174.21)
  Bottom Layer w6: P1.11 v1(1175,2174.21)
RFU_13: J1.13 P1.13 | length 131.1
  Top Layer w6: J1.13 v1(1175,2142.72)
  Bottom Layer w6: P1.13 v1(1175,2142.72)
RFU_15: J1.15 P1.15 | length 131.1
  Top Layer w6: J1.15 v1(1175,2111.22)
  Bottom Layer w6: P1.15 v1(1175,2111.22)
RFU_17: J1.17 P1.17 | length 131.1
  Top Layer w6: J1.17 v1(1175,2079.72)
  Bottom Layer w6: P1.17 v1(1175,2079.72)
RFU_19: J1.19 P1.19 | length 131.1
  Top Layer w6: J1.19 v1(1175,2048.23)
  Bottom Layer w6: P1.19 v1(1175,2048.23)
RFU_21: J1.21 P1.21 | length 131.1
  Top Layer w6: J1.21 v1(1175,2016.73)
  Bottom Layer w6: P1.21 v1(1175,2016.73)
RFU_23: J1.23 P1.23 | length 131.1
  Top Layer w6: J1.23 v1(1175,1985.24)
  Bottom Layer w6: P1.23 v1(1175,1985.24)
SYNC_0: J1.41 P1.41 | length 131.1
  Top Layer w6: J1.41 v1(1175,1701.77)
  Bottom Layer w6: P1.41 v1(1175,1701.77)
pads on no net: J1.M1 J2.M1 J3.16 P1.M2 P2.M2

## Polygon pours and split planes (outlines as drawn)
DRAIN on Top Layer "DRAIN_L01_P000" (solid, pour order 0): 1150,2350 1250,2350 1250,1700 1150,1700

## Keep-outs
Keep-Out Layer:
  lines w18: 1000,1125 1000,2625 cw(c1125,2625) 1125,2750 2625,2750 cw(c2625,2625) 2750,2625 2750,1125 cw(c2625,1125) 2625,1000

## Silkscreen, mask and mechanical layers (free items; w line width, h text height)
Bottom Overlay:
  text ".ProjectOrganization" at 2200,580 h30
  text ".print_Date" at 1780,520 h30
  text ".ProjectRevision" at 1920,520 h30
  text ".ProjectDocumentNumber" at 2200,520 h30
Outline:
  lines w5: 2750,560.36 2750,600 ; 1000,550 ccw(c1075,550) 1075,475 2675,475 ccw(c2675,550) 2750,550 2750,2625 ccw(c2625,2625) 2625,2750 1125,2750 ccw(c1125,2625) 1000,2625 1000,550